# Altium PCB hovercraft.PCBDOC
Units mm, origin at the board's own origin, x right, y up, seen from the top; angles counter-clockwise.
Board outline 299.72 x 199.9 mm, 2 copper layers (Top Layer, Bottom Layer); 17 components, 23 nets, 80 pads, 5 vias.
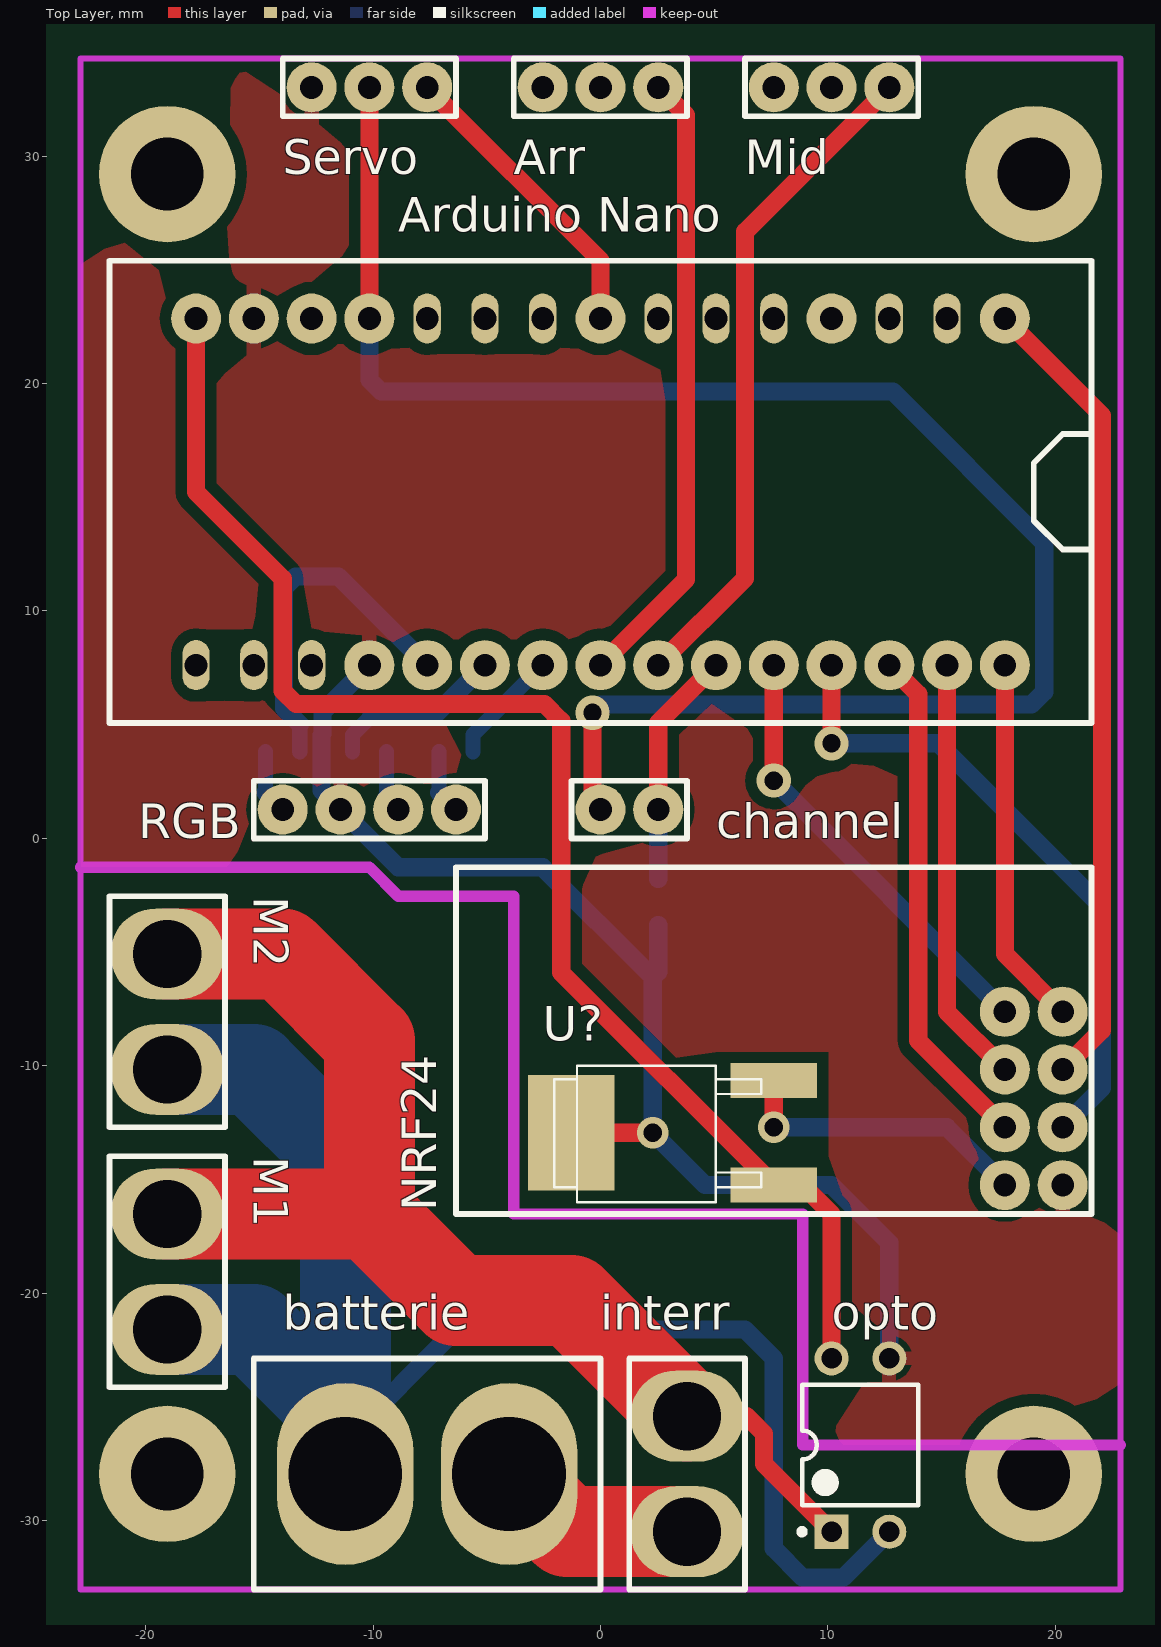
[diagram p0: Top Layer view]
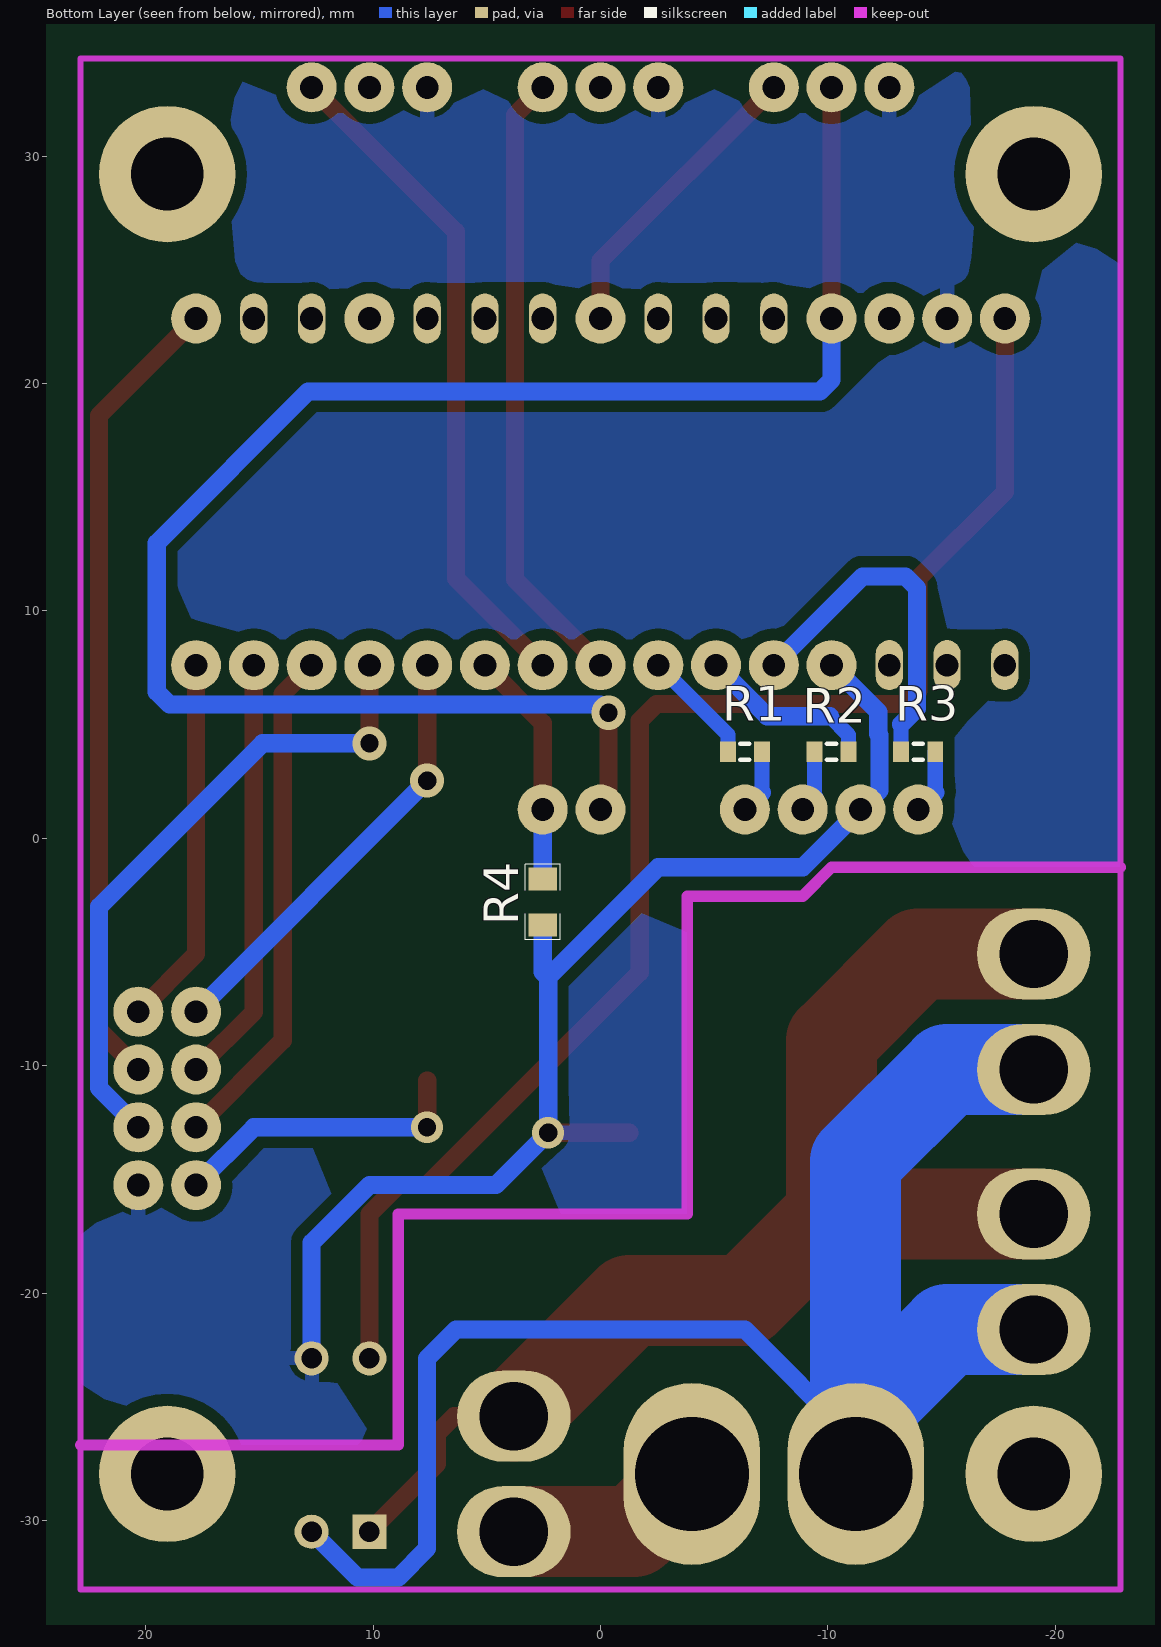
[diagram p1: Bottom Layer view, seen from below]

## Layer stack, top to bottom
Top Solder: solder mask 0.0102, Solder Resist, Dk 3.5
Top Layer: signal copper 0.0356
Dielectric1: dielectric 0.32, FR-4, Dk 4.8
Bottom Layer: signal copper 0.0356
Bottom Solder: solder mask 0.0102, Solder Resist, Dk 3.5

## Board outline
-141.655,-46.39 158.065,-46.39 158.065,153.508 -141.655,153.508

## Design rules (kind name [scope] priority, off if disabled: settings)
Clearance Clearance_bottom_polygon [OnLayer('Bottom Layer') Or OnLayer('Multi-Layer') vs OnLayer('Bottom Layer')  And  InPoly] p1: gap=0.508
Clearance Clearance_top_polygon [OnLayer('Top Layer')  Or OnLayer('Multi-Layer') vs OnLayer('Top Layer') And InPoly] p2: gap=0.508
Clearance Clearance_bottom [OnLayer('Bottom Layer') Or OnLayer('Multi-Layer') vs OnLayer('Bottom Layer')  And Not InPoly] p3: gap=0.203
Clearance Clearance_top [OnLayer('Top Layer')  Or OnLayer('Multi-Layer') vs OnLayer('Top Layer') And Not InPoly] p4: gap=0.203
Clearance Clearance_pad_to_pad [OnLayer('Multi-Layer') vs OnLayer('Multi-Layer')] p5: gap=0.254
ComponentClearance ComponentClearance_bottom [OnLayer('Bottom Overlay') vs OnLayer('Bottom Overlay')] p1: gap=0 collisioncheckmode=3 verticalgap=0.254 showdistances=FALSE
ComponentClearance ComponentClearance_top [OnLayer('Top Overlay') vs OnLayer('Top Overlay')] p2: gap=0 collisioncheckmode=3 verticalgap=0.254 showdistances=FALSE
FabricationTestPointUsage TestPointUsage [All] p1: valid=0 allowmultiple=FALSE
FabricationTestpoint Testpoint [All] p1: side=3 testpointundercomponent=TRUE minsize=1.016 maxsize=2.54 preferedsize=1.524 minholesize=0 maxholesize=1.016 preferedholesize=0.813 testpointgrid=0.025 allowsidetop=TRUE allowsidebottom=TRUE usegrid=TRUE gridtolerance=0
HoleSize [All] p1: absolutevalues=TRUE maxlimit=25.4 minlimit=0.406 maxpercent=80.000 minpercent=20.000
MinimumAnnularRing [PadXSize_AllLayers = PadYSize_AllLayers] p1: minimumring=0.254
PermittedLayers [All] p1: toplayerpermitted=TRUE bottomlayerpermitted=TRUE
PolygonConnect [All] p1: connectstyle=Relief reliefconductorwidth=0.61 reliefentries=4 polygonreliefangle="90 Angle" airgapwidth=0.254
RoutingVias [All] p1: holewidth=0.8 width=1.5 viastyle="Through Hole" minholewidth=0.7 minwidth=1.2 maxholewidth=25.4 maxwidth=25.4
SMDNeckDown [All] p1: percent=95.000
SMDToPlane [All] p1: distance=0
SolderMaskExpansion [All] p1: expansion=0.102
ViasUnderSMD [All] p1: allowed=FALSE
Width [All] p1: maxlimit=4 minlimit=0.254 preferedwidth=0.8 minimp=50.000000 maximp=50.000000 favimp=50.000000
Width Width_botom_top [OnLayer('Bottom Layer') or OnLayer('Top Layer')] p2: maxlimit=254 minlimit=0.254 preferedwidth=0.813
26 further rules are at their usual default settings.

## Classes and differential pairs
component class hovercraft: "Arduino Nano" Arr batterie channel interr M1 M2 Mid NRF24 opto R1 R2 R3 R4 RGB Servo

## Components (designator, comment, footprint, x,y, rotation, side; value= is the part's Value field where it differs from the comment)
"Arduino Nano" "Arduino Nano" "Arduino Nano" -17.78,7.62 r90 top
Arr "Port Moteur Arrière" PortServomoteur -2.54,33.02 r90 top
batterie "batterie" xt60 -7.62,-27.94 r270 top
channel "PortBouton" PortBouton 2.54,1.27 r270 top
interr "batterie" batterie 3.81,-27.94 r0 top
M1 "batterie" batterie -19.05,-19.05 r0 top
M2 "batterie" batterie -19.05,-7.62 r0 top
Mid "Port Moteur Central" PortServomoteur 7.62,33.02 r90 top
NRF24 "NRF24" NRF24 20.32,-15.24 r180 top
opto "Optoisolator1" DIP-4 11.43,-26.67 r90 top (schematic designator U?)
R1 "Res3" J1-0603 -6.35,3.81 r180 bottom
R2 "Res3" J1-0603 -10.16,3.81 r0 bottom
R3 "Res3" J1-0603 -13.97,3.81 r180 bottom
R4 "RES" 0805 2.54,-3.81 r90 bottom
RGB "Led RGB" "Led RGB" -6.35,1.27 r180 top
Servo "Port Servo" PortServomoteur -12.7,33.02 r90 top
U? "78xx" TO252 7.62,-15.24 r90 top

## Footprints (in the part's own frame and the unit in brackets; to place one, negate y for a bottom-side part, rotate by r counter-clockwise, add the part's x,y. Pads: shape width x height; smd on the part's side, far side on the other; paste and mask are expansions set on the pad)
0805 [mil]
  rect 40x50 smd: 1(0,0) 2(80,0)
  silkscreen extent -25,-30 105,30
"Arduino Nano" [mm]
  oval 2.2x1.2 hole 1: 1(0,0) 2(0,-2.54) 3(0,-5.08) 20(15.24,-10.16) 21(15.24,-12.7) 22(15.24,-15.24) 24(15.24,-20.32) 25(15.24,-22.86) 26(15.24,-25.4) 28(15.24,-30.48) 29(15.24,-33.02)
  round 2.2 hole 1: 4(0,-7.62) 5(0,-10.16) 6(0,-12.7) 7(0,-15.24) 8(0,-17.78) 9(0,-20.32) 10(0,-22.86) 11(0,-25.4) 12(0,-27.94) 13(0,-30.48) 14(0,-33.02) 15(0,-35.56) 16(15.24,0) 17(15.24,-2.54) 18(15.24,-5.08) 19(15.24,-7.62) 23(15.24,-17.78) 27(15.24,-27.94) 30(15.24,-35.56)
  silkscreen extent -2.54,-39.37 17.78,3.81
batterie [mm]
  oval 5x4 hole 3: 1(0,2.54) 2(0,-2.54)
  silkscreen extent -2.54,-5.08 2.54,5.08
DIP-4 [mm] "DIP; 4 Leads; Row Spacing 7.62 mm; Pitch 2.54 mm"
  rect 1.5x1.5 hole 0.9: 1(-3.81,1.27)
  round 1.5 hole 0.9: 2(-3.81,-1.27) 3(3.81,-1.27) 4(3.81,1.27)
  silkscreen extent -3.93,-2.55 2.65,2.69, body extent -3.15,-2.5 3.15,2.5, height 5.6
J1-0603 [mm] "Chip Resistor, Body 1.6x0.8mm, IPC High Density"
  rect 0.7x0.9 smd: 1(-0.75,0) 2(0.75,0)
  silkscreen extent -0.2,-0.35 0.2,0.35, body extent -0.85,-0.48 0.85,0.48, height 0.9
"Led RGB" [mm]
  round 2.2 hole 1: 1(0,0) 2(2.54,0) 3(5.08,0) 4(7.62,0)
  silkscreen extent -1.27,-1.27 8.89,1.27
NRF24 [mm]
  round 2.2 hole 1: 1(0,0) 2(2.54,0) 3(0,-2.54) 4(2.54,-2.54) 5(0,-5.08) 6(2.54,-5.08) 7(0,-7.62) 8(2.54,-7.62)
  silkscreen extent -1.27,-13.97 26.67,1.27
PortBouton [mm]
  round 2.2 hole 1: 1(0,0) 2(0,-2.54)
  silkscreen extent -1.27,-3.81 1.27,1.27
PortServomoteur [mm]
  round 2.2 hole 1: 1(0,0) 2(0,-2.54) 3(0,-5.08)
  silkscreen extent -1.27,-6.35 1.27,1.27
TO252 [mil]
  rect 60x150 smd: 1(0,0) 3(181.1,0)
  rect 200x150 smd: 2(90.55,350.39)
  silkscreen extent -30,22 207,380
xt60 [mm]
  oval 8x6 hole 5: 1(0,3.6)
  oval 8x6 hole 5 paste+0: 2(0,-3.6)
  silkscreen extent -5.08,-7.62 5.08,7.62

## Part data
Arr Mid: library part "Port Servo"
opto: "4-Pin Phototransistor Optocoupler"
R1 R2 R3: "Resistor"
R4: "resistance"
U?: library part REG_POS, "régulateur positif fixe"

## Free pads (board coordinates)
  round 6 hole 3.2: 0(-19.05,-27.94) 1(19.05,-27.94) 2(19.05,29.21) 3(-19.05,29.21)

## Via types
v1: diameter 1.5, hole 0.8, Top Layer to Bottom Layer, 3 vias
v2: diameter 1.4, hole 0.8, Top Layer to Bottom Layer, 2 vias

## Nets (pads, with @x,y where several pads share a name; then routed paths per layer and width w, separated by ;. In a path a pad name is that pad's centre, name@x,y a point inside that pad or via, vN(x,y) a via of type N, cw(c..) or ccw(c..) an arc to the next point about the centre after c; other vN are vias at no path point)
GND: "Arduino Nano.4" "Arduino Nano.17" Arr.1 Mid.1 NRF24.1 opto.3 R4.1 RGB.3 Servo.1 U?.2 | length 54.7
  Top Layer w0.8: U?.2 v2(2.3,-12.94)
  Bottom Layer w0.8: -10.16,7.62 -12.217,5.563 -12.217,4.604 -12.267,4.554 -12.267,2.107 RGB.3 -8.89,-1.27 -2.54,-1.27 2.3,-6.11 ; R4.1 2.54,-5.87 2.3,-6.11 ; opto.3 12.7,-17.78 10.16,-15.24 4.6,-15.24 v2(2.3,-12.94) 2.3,-6.11
"GND BATTERIE": batterie.2 M1.2 M2.2 opto.2 | length 68.9
  Bottom Layer w0.8: batterie.2@-11.22,-26.46 -6.35,-21.59 6.35,-21.59 7.62,-22.86 7.62,-31.223 8.89,-32.493 10.687,-32.493 opto.2
  Bottom Layer w4: M1.2 -15.24,-21.59 batterie.2@-11.22,-25.61 ; M2.2 -15.24,-10.16 -11.22,-14.18 batterie.2@-11.22,-25.61 ; batterie.2 -11.22,-26.46 batterie.2@-11.22,-25.61
"NetArduino Nano_5": "Arduino Nano.5" R3.1 | length 15.6
  Bottom Layer w0.665: R3.1 -13.22,5.02
  Bottom Layer w0.8: -13.22,5.02 -13.918,5.718 -13.918,11.014 -13.41,11.522 -11.522,11.522 -7.62,7.62
"NetArduino Nano_6": "Arduino Nano.6" R2.1 | length 7.8
  Bottom Layer w0.665: R2.1 -10.91,4.548 -10.083,5.375
  Bottom Layer w0.8: -10.083,5.375 -7.325,5.375 -5.08,7.62
"NetArduino Nano_7": "Arduino Nano.7" R1.1 | length 5.1
  Bottom Layer w0.665: R1.1 -5.6,4.56 -2.54,7.62
"NetArduino Nano_8": "Arduino Nano.8" Arr.3 | length 27.5
  Top Layer w0.8: 0,7.62 3.76,11.38 3.76,31.8 Arr.3
"NetArduino Nano_9": "Arduino Nano.9" Mid.3 | length 29.6
  Top Layer w0.8: 2.54,7.62 6.351,11.431 6.351,26.671 Mid.3
"NetArduino Nano_10": "Arduino Nano.10" channel.1 R4.2 | length 10.5
  Top Layer w0.8: channel.1 2.54,5.08 5.08,7.62
  Bottom Layer w0.8: R4.2 channel.1
"NetArduino Nano_11": "Arduino Nano.11" NRF24.8 | length 19.4
  Top Layer w0.8: v1(7.62,2.54) 7.62,7.62
  Bottom Layer w0.8: v1(7.62,2.54) NRF24.8
"NetArduino Nano_12": "Arduino Nano.12" NRF24.3 | length 28.7
  Top Layer w0.8: v1(10.16,4.181) 10.16,7.62
  Bottom Layer w0.8: v1(10.16,4.181) 14.86,4.181 22.048,-3.007 22.048,-10.972 NRF24.3
"NetArduino Nano_13": "Arduino Nano.13" NRF24.4 | length 22.4
  Top Layer w0.8: 12.7,7.62 13.97,6.35 13.97,-8.89 NRF24.4
"NetArduino Nano_14": "Arduino Nano.14" NRF24.6 | length 18.8
  Top Layer w0.8: 15.24,7.62 15.24,-7.62 NRF24.6
"NetArduino Nano_15": "Arduino Nano.15" NRF24.7 | length 16.3
  Top Layer w0.8: 17.78,7.62 17.78,-5.08 NRF24.7
"NetArduino Nano_19": "Arduino Nano.19" channel.2 Servo.2 | length 76.7
  Top Layer w0.8: -10.16,22.86 Servo.2 ; v1(-0.355,5.528) -0.355,1.625 channel.2
  Bottom Layer w0.8: -10.16,22.86 -10.16,20.158 -9.652,19.65 12.853,19.65 19.508,12.995 19.508,6.442 18.949,5.883 0.001,5.883 v1(-0.355,5.528)
"NetArduino Nano_23": "Arduino Nano.23" Servo.3 | length 13.3
  Top Layer w0.8: Servo.3 0,25.4 0,22.86
"NetArduino Nano_30": "Arduino Nano.30" NRF24.5 | length 35.5
  Top Layer w0.8: 17.78,22.86 22.048,18.592 22.048,-8.432 NRF24.5
NetBatterie_1: batterie.1 interr.2 | length 8.9
  Top Layer w4: batterie.1 -1.48,-30.48 interr.2
NetNRF24_2: NRF24.2 U?.3 | length 12.8
  Top Layer w0.8: v2@7.62,-12.275 U?.3
  Bottom Layer w0.8: v2(7.62,-12.7) 15.24,-12.7 NRF24.2
NetR1_2: R1.2 RGB.1 | length 2.9
  Bottom Layer w0.665: RGB.1@-7.1,2.02 R1.2
  Bottom Layer w0.8: RGB.1@-7.1,2.02 RGB.1
NetR2_2: R2.2 RGB.2 | length 2.8
  Bottom Layer w0.665: RGB.2@-9.41,1.79 R2.2
  Bottom Layer w0.8: RGB.2@-9.41,1.79 RGB.2
NetR3_2: R3.2 RGB.4 | length 2.9
  Bottom Layer w0.665: RGB.4@-14.72,2.02 R3.2
  Bottom Layer w0.8: RGB.4@-14.72,2.02 RGB.4
VCC: "Arduino Nano.16" opto.4 U?.1 | length 64.4
  Top Layer w0.8: -17.78,22.86 -17.78,15.24 -13.97,11.43 -13.97,6.494 -13.385,5.909 -2.463,5.909 -1.726,5.172 -1.726,-5.894 U?.1 8.89,-15.24 10.16,-16.51 10.16,-17.79 opto.4
"VCC BATTERIE": interr.1 M1.1 M2.1 opto.1 | length 53.9
  Top Layer w0.8: interr.1 6.427,-25.4 7.189,-26.162 7.189,-27.509 opto.1
  Top Layer w4: M1.1 -10.16,-16.51 ; M2.1 -13.97,-5.08 -10.16,-8.89 -10.16,-16.51 ; interr.1 -1.27,-20.32 -6.35,-20.32 -10.16,-16.51
pads on no net: "Arduino Nano.1" "Arduino Nano.2" "Arduino Nano.3" "Arduino Nano.18" "Arduino Nano.20" "Arduino Nano.21" "Arduino Nano.22" "Arduino Nano.24" "Arduino Nano.25" "Arduino Nano.26" "Arduino Nano.27" "Arduino Nano.28" "Arduino Nano.29" Arr.2 Mid.2

## Polygon pours and split planes (outlines as drawn)
GND on Bottom Layer "Bot GND" (solid, remove dead copper, pour order 12): -22.86,34.29 -22.86,-1.27 -10.16,-1.27 -8.89,-2.54 -3.81,-2.54 -3.81,-16.51 8.89,-16.51 8.89,-26.67 22.86,-26.67 22.86,34.29
GND on Top Layer "Bot GND" (solid, remove dead copper, pour order 14): -22.86,34.29 -22.86,-1.27 -10.16,-1.27 -8.89,-2.54 -3.81,-2.54 -3.81,-16.51 8.89,-16.51 8.89,-26.67 22.86,-26.67 22.86,34.29

## Keep-outs
Keep-Out Layer:
  rectangle: -140.695,-42.73 -135.695,157.27
  rectangle: -135.695,-42.73 154.305,-37.73
  rectangle: 149.305,-37.73 154.305,157.27
  rectangle: -135.695,152.27 149.305,157.27
  lines w0.254: -22.86,-33.02 -22.86,34.29 22.86,34.29 22.86,-33.02 -22.86,-33.02
  lines w0.5: -22.86,-1.27 -21.59,-1.27 -16.828,-1.27 -10.16,-1.27 -8.89,-2.54 -3.81,-2.54 -3.81,-16.51 8.89,-16.51 8.89,-26.67 22.86,-26.67

## Silkscreen, mask and mechanical layers (free items; w line width, h text height)
Top Overlay:
  text "Les bandes en violet delimitent la surface utilisable...." at -144.907,179.832 h6.35
  text "Mais vous n'etes pas obliges de tout utiliser!!" at -128.651,169.545 h6.35
Mechanical 1:
  lines w0.254: -22.86,33.02 -22.86,-33.02 22.86,-33.02 22.86,33.02 ; -22.86,34.29 22.86,34.29